# EAGLE board PBC-2 (EAGLE 7.1.0)
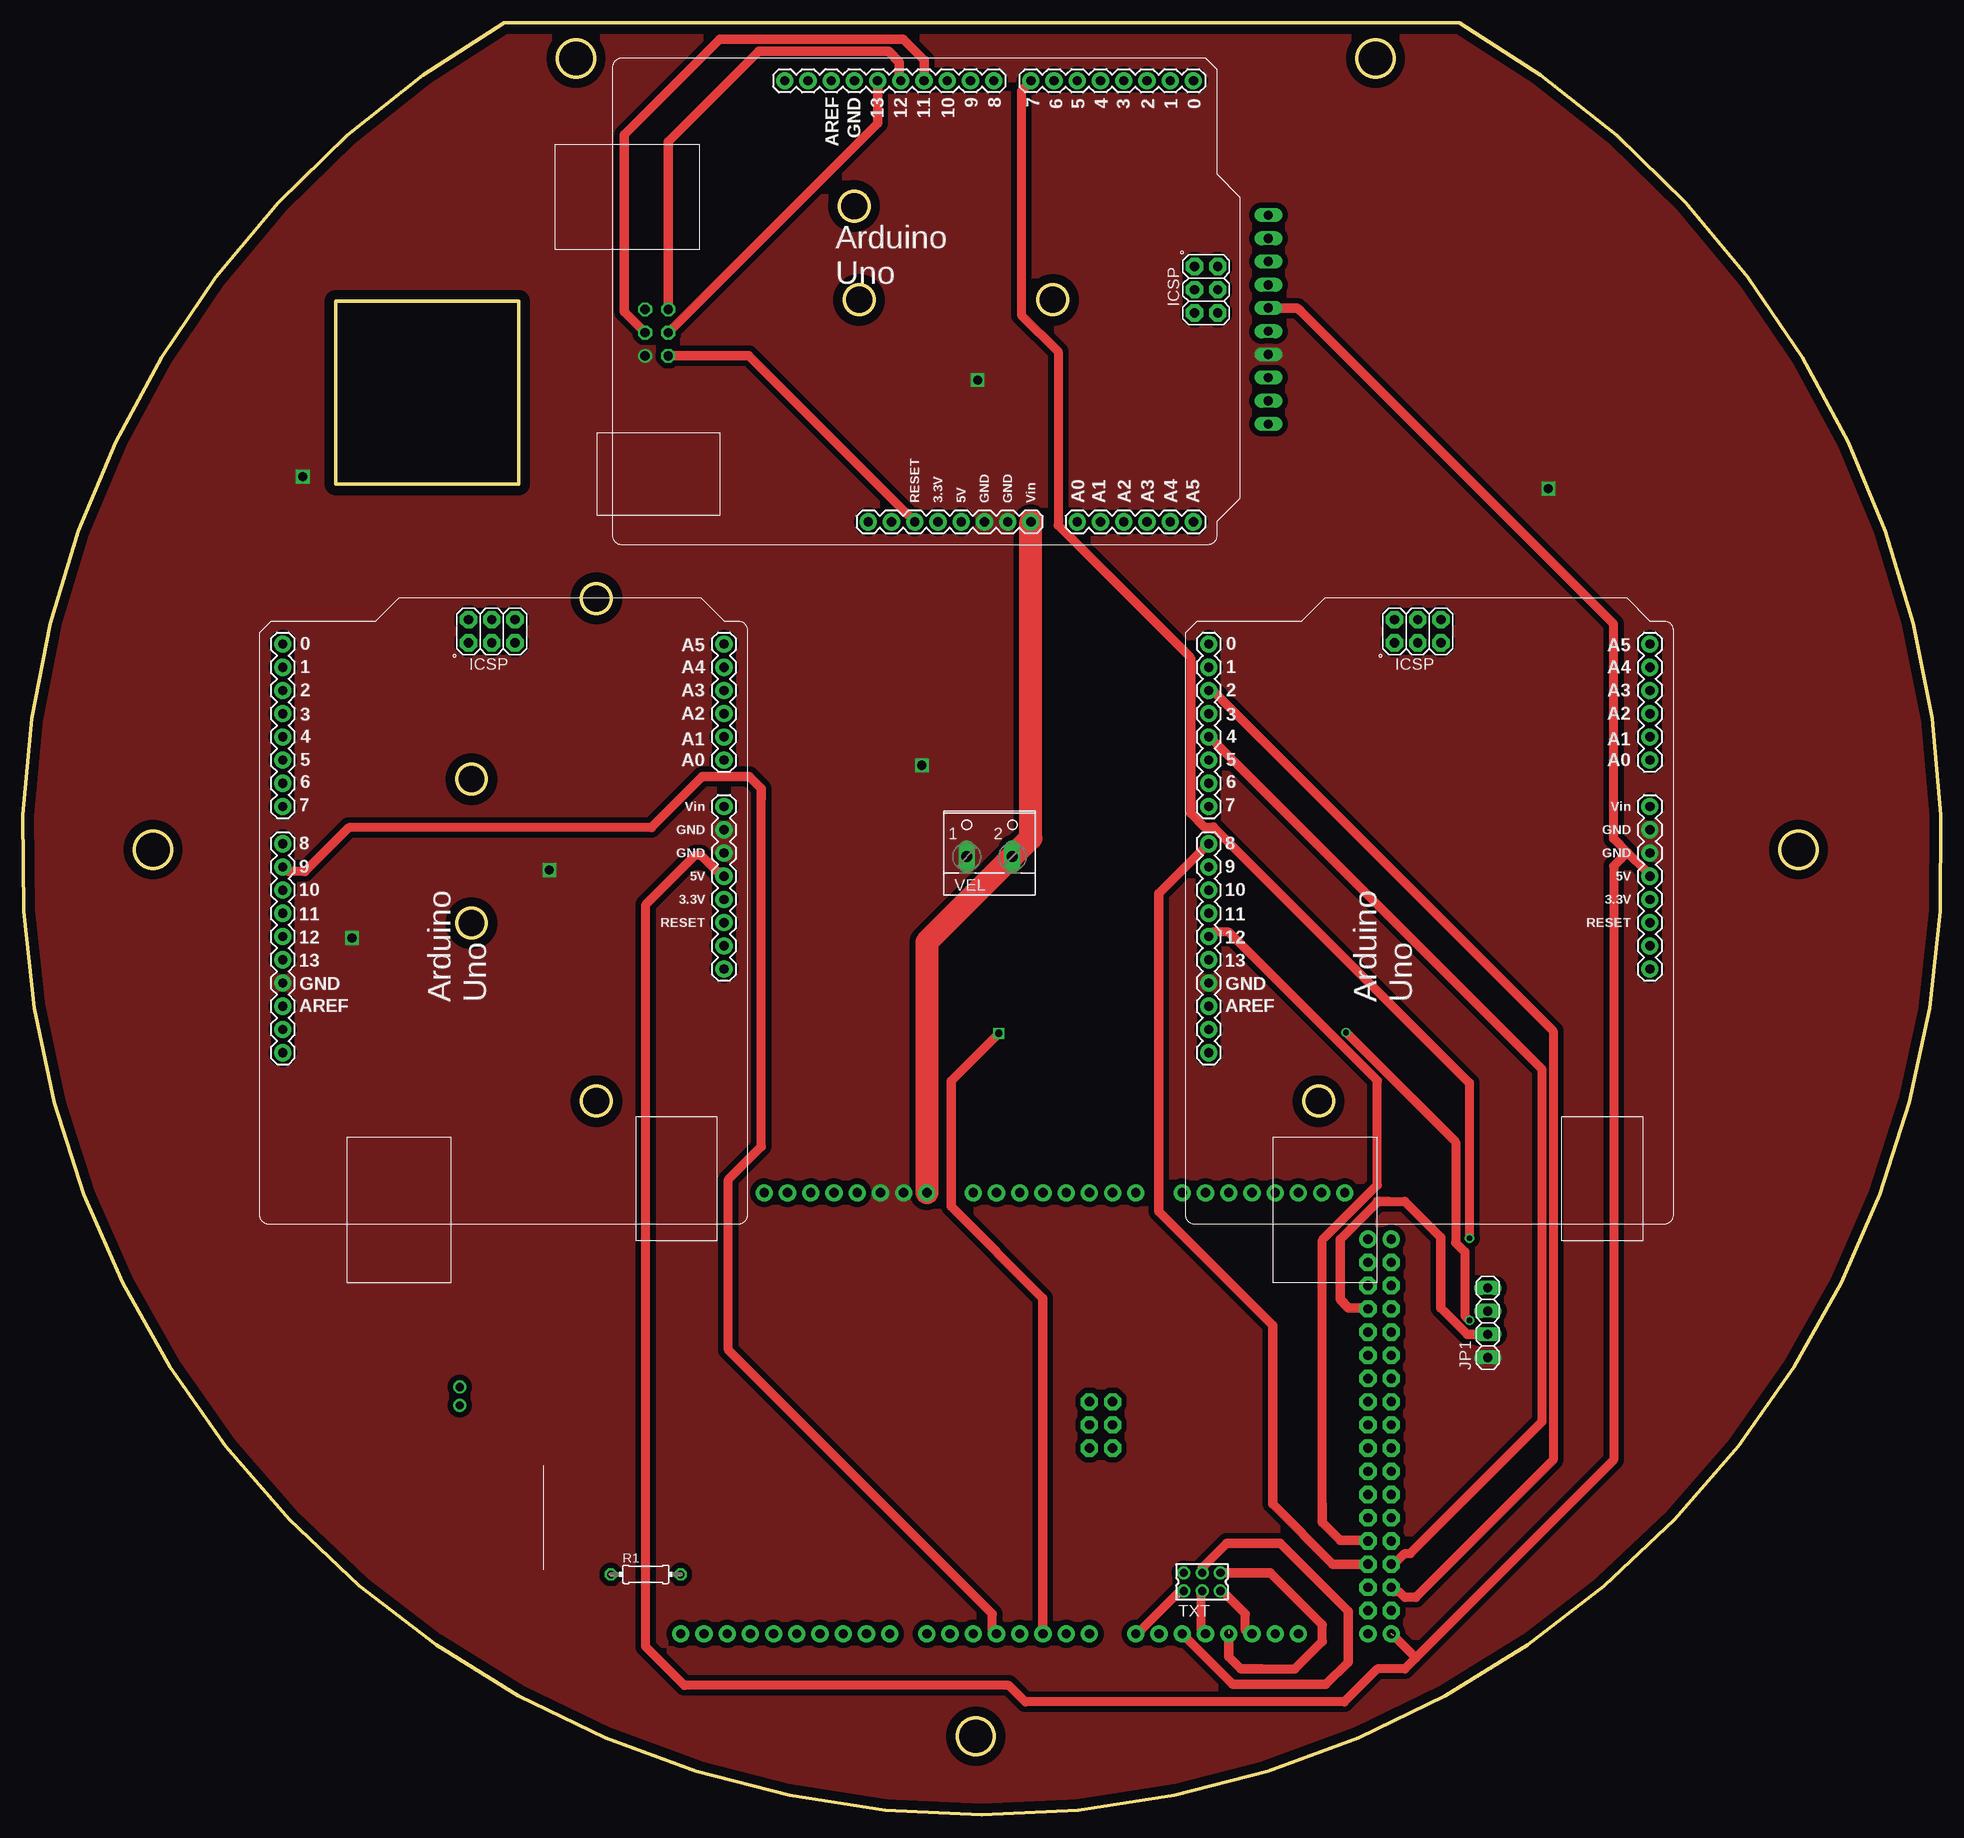
[diagram p0: board, top side]
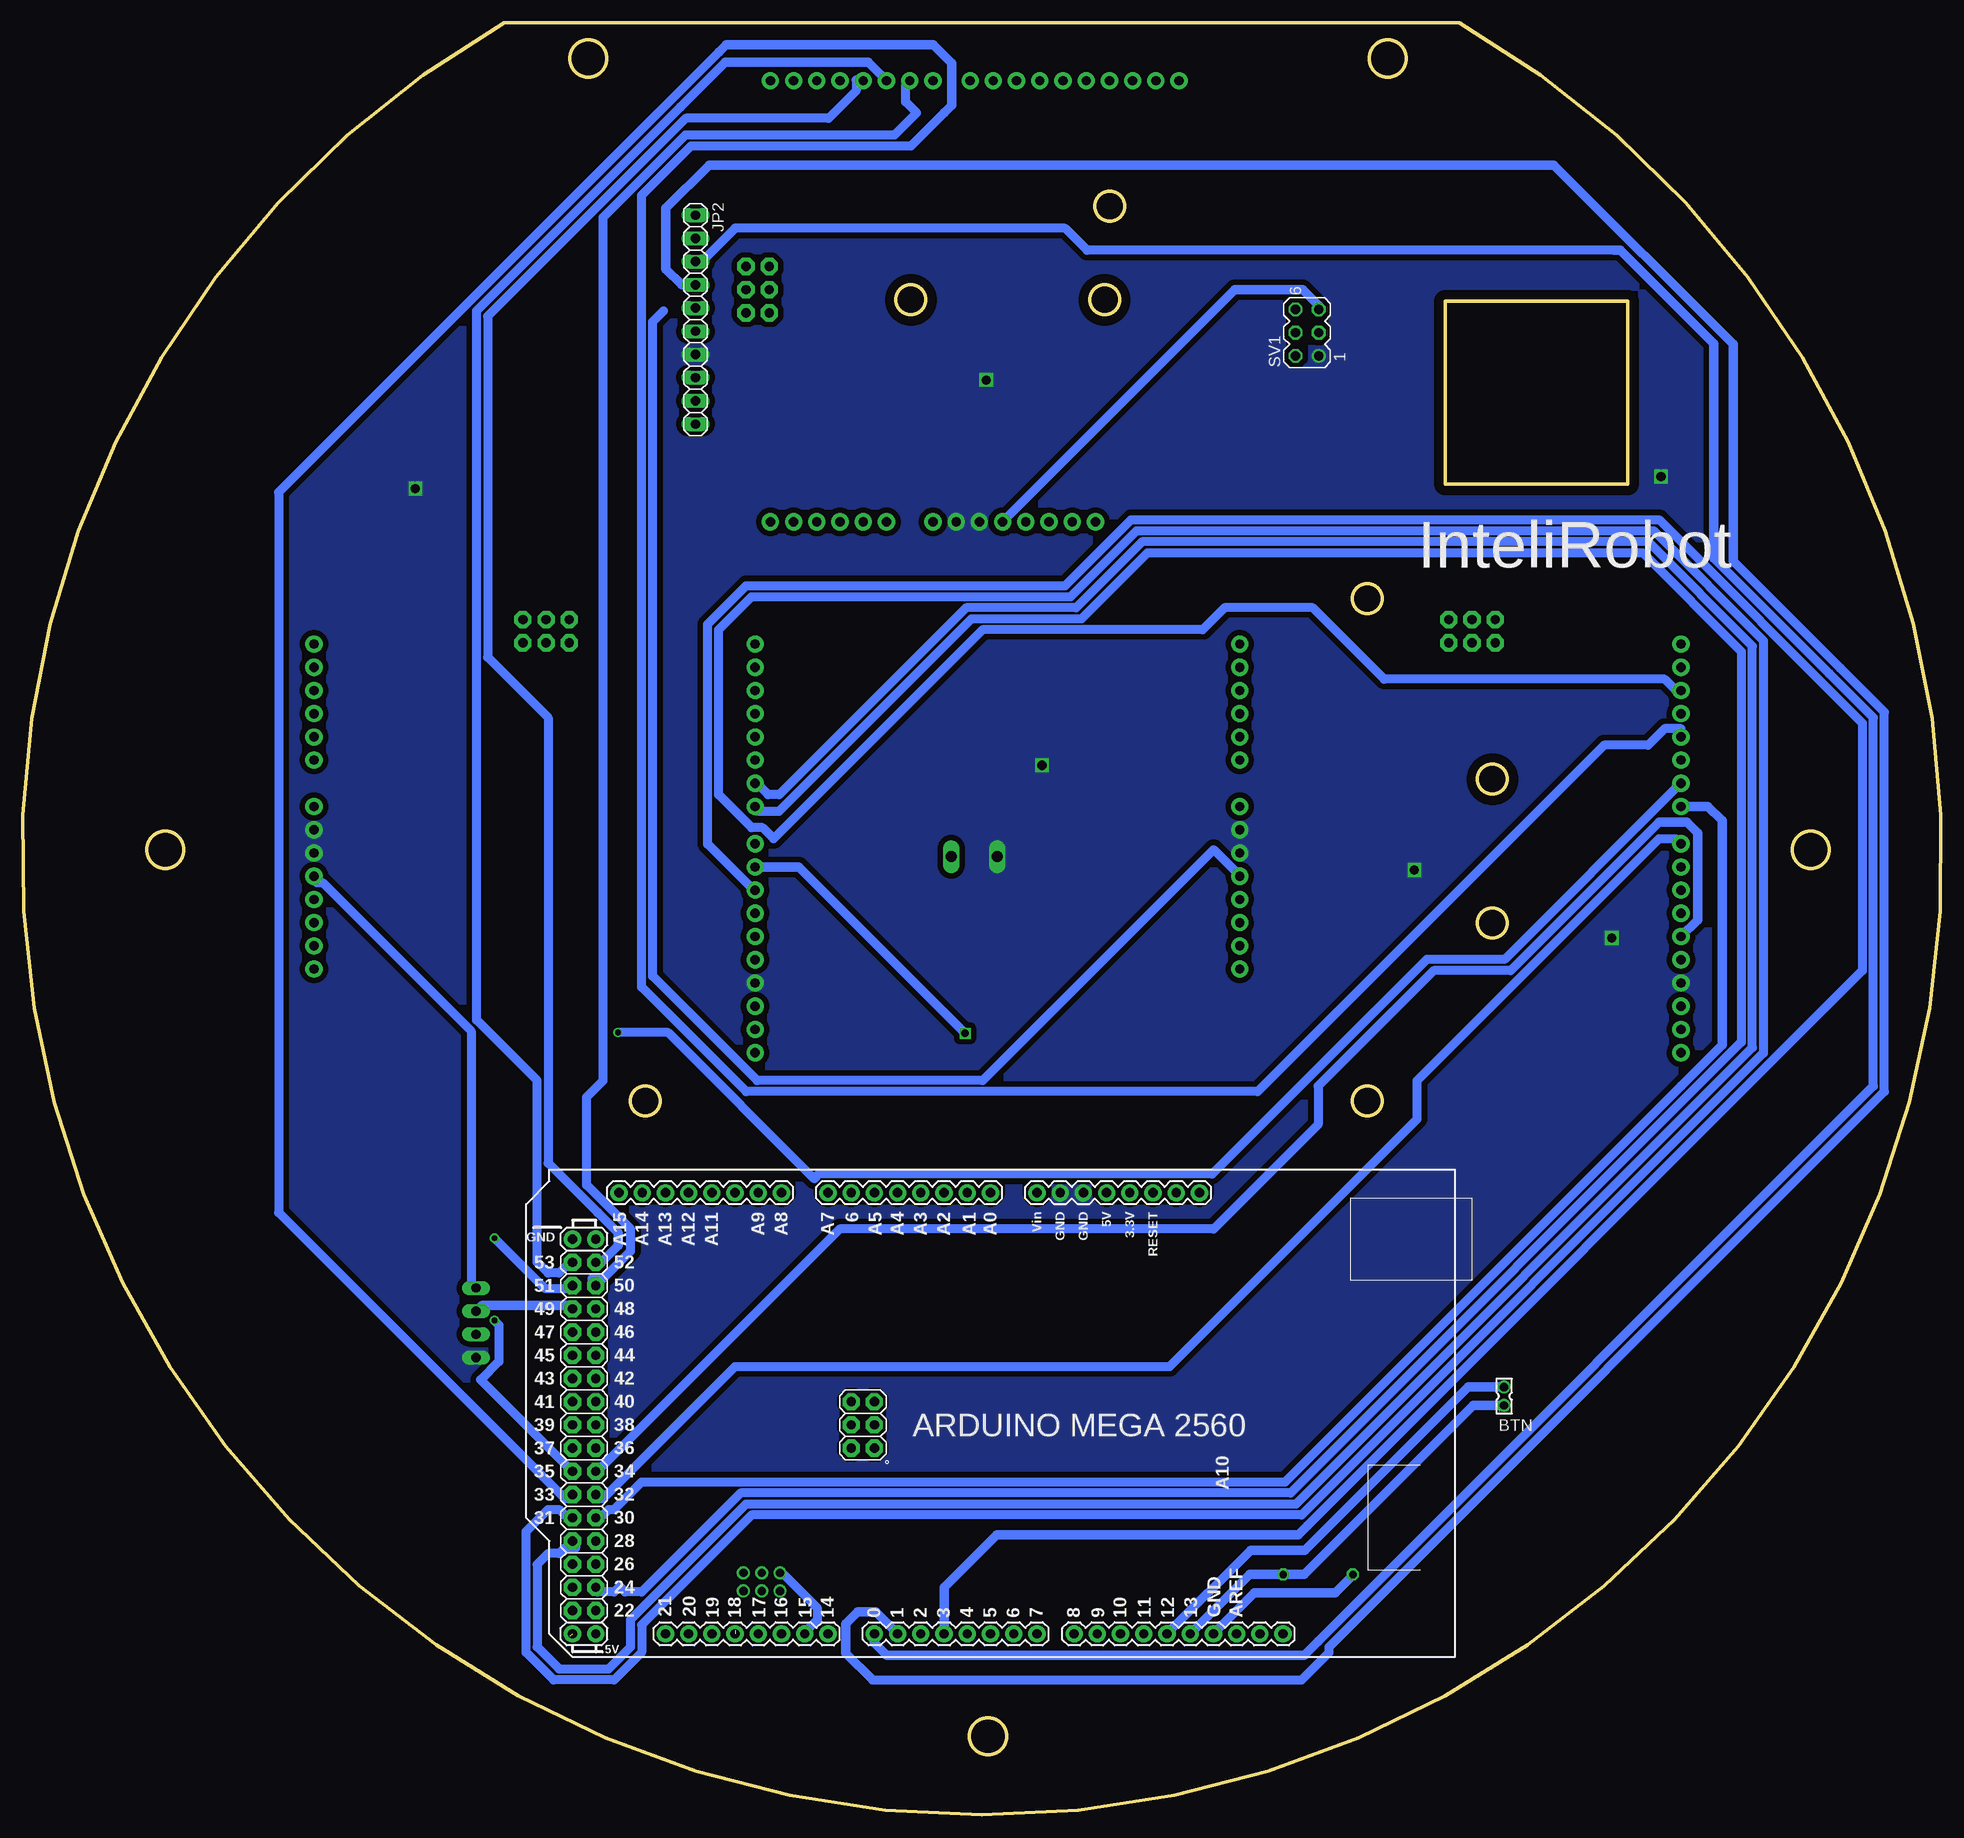
[diagram p1: board, bottom side, seen from below]

Size 209.81 x 196.08 mm. Coordinates in mm from the lower left corner, seen from the top.
Outline: 157.15,196.08 52.67,196.08 arc300 157.15,196.08
Outline: 34.24,145.61 34.24,165.61 54.24,165.61 54.24,145.61 34.24,145.61
Outline: circle at 62.74,133.11 radius 1.6
Outline: circle at 62.74,78.11 radius 1.6
Outline: circle at 90.94,176.04 radius 1.6
Outline: circle at 141.74,78.11 radius 1.6
Outline: circle at 49.08,113.32 radius 1.6
Outline: circle at 49.08,97.58 radius 1.6
Outline: circle at 112.68,165.78 radius 1.6
Outline: circle at 60.51,192.19 radius 2
Outline: circle at 147.97,192.19 radius 2
Outline: circle at 14.24,105.61 radius 2
Outline: circle at 194.24,105.61 radius 2
Outline: circle at 104.24,8.61 radius 2
Outline: circle at 91.48,165.78 radius 1.6
Copper layers (1*16): Top 0.035mm / dielectric 1.5mm / Bottom 0.035mm
Design rules "default *": minimum track width 1mm, minimum drill 24mil, track to track 8mil, track to pad 8mil, pad to pad 8mil, via to via 8mil, smd to smd 8mil, copper to edge 40mil, drill to drill 8mil, minimum pad ring 10mil, minimum via ring 8mil, stop-mask expansion 4mil, vias tented up to drill 0mil, thermal gap 10mil

## Footprints (pad centres in the part's own frame; a part is rotated, then mirrored left to right if it is on the bottom)
332-02 = drill 0.9 pad 1.27: 1 0,-1; 2 0,1
1X04 = drill 1.016 long: 1 -3.81,0; 2 -1.27,0; 3 1.27,0; 4 3.81,0
1X10 = drill 1.016 long: 1 -11.43,0; 2 -8.89,0; 3 -6.35,0; 4 -3.81,0; 5 -1.27,0; 6 1.27,0; 7 3.81,0; 8 6.35,0; 9 8.89,0; 10 11.43,0
ARDUINO_MEGA2560 = drill 1.016 pad 1.88: 0 38.1,50.8; 1 40.64,50.8; 2 43.18,50.8; 3 45.72,50.8; 3.3V 66.04,2.54; 4 48.26,50.8; 5 50.8,50.8; 5V 63.5,2.54; 5V. 7.62,50.8; 5V.. 5.08,50.8; 6 53.34,50.8; 7 55.88,50.8; 8 59.944,50.8; 9 62.484,50.8; 10 65.024,50.8; 11 67.564,50.8; 12 70.104,50.8; 13 72.644,50.8; 14 33.02,50.8; 15 30.48,50.8; 16 27.94,50.8; 17 25.4,50.8; 18 22.86,50.8; 19 20.32,50.8; 20 17.78,50.8; 21 15.24,50.8; A0 50.8,2.54; A1 48.26,2.54; A2 45.72,2.54; A3 43.18,2.54; A4 40.64,2.54; A5 38.1,2.54; A6 35.56,2.54; A7 33.02,2.54; A8 27.94,2.54; A9 25.4,2.54; A10 22.86,2.54; A11 20.32,2.54; A12 17.78,2.54; A13 15.24,2.54; A14 12.7,2.54; A15 10.16,2.54; AREF 77.724,50.8; GND 75.184,50.8; GND. 58.42,2.54; GND.. 60.96,2.54; GND... 7.62,7.62; GND.... 5.08,7.62; I/OREF 71.12,2.54; N/C 73.66,2.54; RESET 68.58,2.54; SCL1 82.804,50.8; SDA1 80.264,50.8; VIN 55.88,2.54 | drill 1.016 pad 1.88 octagon: 22 7.62,48.26; 23 5.08,48.26; 24 7.62,45.72; 25 5.08,45.72; 26 7.62,43.18; 27 5.08,43.18; 28 7.62,40.64; 29 5.08,40.64; 30 7.62,38.1; 31 5.08,38.1; 32 7.62,35.56; 33 5.08,35.56; 34 7.62,33.02; 35 5.08,33.02; 36 7.62,30.48; 37 5.08,30.48; 38 7.62,27.94; 39 5.08,27.94; 40 7.62,25.4; 41 5.08,25.4; 42 7.62,22.86; 43 5.08,22.86; 44 7.62,20.32; 45 5.08,20.32; 46 7.62,17.78; 47 5.08,17.78; 48 7.62,15.24; 49 5.08,15.24; 50 7.62,12.7; 51 5.08,12.7; 52 7.62,10.16; 53 5.08,10.16; +5V_ 35.56,30.48; GND__ 35.56,25.4; MISO 38.1,30.48; MOSI 35.56,27.94; RESET. 38.1,25.4; SCK 38.1,27.94
ARDUINO_UNO = drill 1.016 pad 1.88: 0 63.5,50.8; 1 60.96,50.8; 2 58.42,50.8; 3 55.88,50.8; 3.3V 35.56,2.54; 4 53.34,50.8; 5 50.8,50.8; 5V 38.1,2.54; 6 48.26,50.8; 7 45.72,50.8; 8 41.656,50.8; 9 39.116,50.8; 10 36.576,50.8; 11 34.036,50.8; 12 31.496,50.8; 13 28.956,50.8; A0 50.8,2.54; A1 53.34,2.54; A2 55.88,2.54; A3 58.42,2.54; A4 60.96,2.54; A5 63.5,2.54; AREF 23.876,50.8; GND 26.416,50.8; GND. 43.18,2.54; GND.. 40.64,2.54; I/OREF 30.48,2.54; N/C 27.94,2.54; RESET 33.02,2.54; SCL 18.796,50.8; SDA 21.336,50.8; VIN 45.72,2.54 | drill 1.016 pad 1.88 octagon: +5V 66.167,30.48; GND_ 66.167,25.4; MISO 63.627,30.48; MOSI 66.167,27.94; RESET. 63.627,25.4; SCK 63.627,27.94
0204/7 = drill 0.813 octagon: 1 -3.81,0; 2 3.81,0
MA03-2 = drill 1.016: 1 -2.54,-1.27 | drill 1.016 octagon: 2 -2.54,1.27; 3 0,-1.27; 4 0,1.27; 5 2.54,-1.27; 6 2.54,1.27
87758-0616 = drill 0.9 pad 1.27: 1 -2,-1; 2 -2,1; 3 0,-1; 4 0,1; 5 2,-1; 6 2,1
W237-102 = drill 1.194 long: 1 -2.5,-1.27; 2 2.5,-1.27

## Placement (x,y rotation side)
BTN  [332-02]  47.79,45.82 0 bottom
JP1  [1X04]  160.24,53.85 90 top
JP2  [1X10]  136.24,163.61 270 bottom
MEGA  ARDUINO_MEGA2560  [ARDUINO_MEGA2560]  154.77,70.61 180 top
PUENTE1  ARDUINO_UNO  [ARDUINO_UNO]  180.52,64.61 90 top
PUENTE2  ARDUINO_UNO  [ARDUINO_UNO]  79.24,64.61 90 top
R1  [0204/7]  68.14,26.32 0 top
SV1  [MA03-2]  69.33,162.18 90 bottom
TXT  [87758-0616]  129,25.5 0 top
UNO  ARDUINO_UNO  [ARDUINO_UNO]  64.54,138.95 0 top
VEL  [W237-102]  105.74,106.12 0 top

## Library data of the parts
BTN = con-garry
JP1 JP2 = pinhead
MEGA PUENTE1 PUENTE2 UNO = E14_Arduino_revB
R1 = eagle-ltspice
SV1 = con-lstb; OC_FARNELL: unknown; OC_NEWARK: unknown
TXT = con-molex; MPN: 87758-0616; OC_FARNELL: 7472323; OC_NEWARK: 25M5667
VEL = con-wago-500; MPN: 237-102; OC_FARNELL: unknown; OC_NEWARK: 70K9898

## Nets
+5V: JP1.4 JP2.5 MEGA.5V.. PUENTE1.5V PUENTE2.5V
ECHO: JP1.2 MEGA.48
GND: JP1.1 JP2.7 MEGA.GND. MEGA.GND.. PUENTE1.GND PUENTE1.GND. PUENTE1.GND.. PUENTE2.GND PUENTE2.GND. PUENTE2.GND.. SV1.1 UNO.GND. UNO.GND.. VEL.1
M1ENL: MEGA.35 PUENTE2.6
M1ENR: MEGA.29 PUENTE1.6
M1INAL: MEGA.31 PUENTE2.2
M1INAR: MEGA.25 PUENTE1.2
M1INBL: MEGA.33 PUENTE2.4
M1INBR: MEGA.27 PUENTE1.4
M1PWML: MEGA.4 PUENTE2.9
M1PWMR: MEGA.2 PUENTE1.9
M2ENL: MEGA.34 PUENTE2.12
M2ENR: MEGA.28 PUENTE1.12
M2INAL: MEGA.30 PUENTE2.7
M2INAR: MEGA.24 PUENTE1.7
M2INBL: MEGA.32 PUENTE2.8
M2INBR: MEGA.26 PUENTE1.8
M2PWML: PUENTE2.10
M2PWMR: MEGA.3 PUENTE1.10
MISO: SV1.6 UNO.12
MOSI: SV1.3 UNO.11
PIXY1: MEGA.51 UNO.7
PIXY2: MEGA.50 UNO.6
PIXY3: MEGA.53 UNO.5
PIXY4: MEGA.52 UNO.4
RESET: SV1.2 UNO.RESET
RX-CS: MEGA.15 TXT.2
RX-IR: MEGA.19 TXT.5
RX-LT: MEGA.17 TXT.3
RX-XBEE: MEGA.1
S$1: BTN.2 MEGA.12
S$2: BTN.1 MEGA.13 R1.2
S$3: MEGA.GND R1.1
SCK: SV1.4 UNO.13
SCL: MEGA.SCL1
SDA: MEGA.SDA1
TRIG: JP1.3 MEGA.49
TX-CS: MEGA.14 TXT.1
TX-IR: MEGA.18 TXT.6
TX-LT: MEGA.16 TXT.4
TX-XBEE: JP2.3 MEGA.0
V+: SV1.5 UNO.5V
VCC: MEGA.VIN UNO.VIN VEL.2

## Tracks (layer width: path | path; a pad name or v marks a point on that pad's centre or on a via)
+5V  (1 unrouted)
  Top 1: 139.73,164.57 174.02,130.28 174.02,106.81 175.53,105.31 | 175.53,105.31 177.63,103.21 PUENTE1.5V | 152.36,17.18 149.96,19.58 | 152.36,17.18 174.02,38.83 174.02,103.81 175.53,105.31 | 152.36,17.18 151.16,15.97 148.15,15.97 144.54,12.36 109.65,12.36 107.85,14.17 72.35,14.17 68.14,18.38 68.14,99.6 73.55,105.01 74.16,105.01 75.96,103.21 76.56,103.21 PUENTE2.5V
  Top 1.016: 139.73,164.57 139.42,164.88 JP2.5
  Bottom 1: JP1.4 160.79,58.09 160.79,85.76 177.03,102 177.63,102 178.23,102.6 PUENTE1.5V | 139.73,164.57 140.93,163.37 140.93,91.77 129.5,80.34 104.84,80.34 79.57,105.61 77.16,103.21 PUENTE2.5V
ECHO
  Top 1: 159.58,52.67 160.19,52.67 JP1.2 | 149.36,67.11 151.16,67.11
  Top 1.016: 149.36,67.11 148.15,67.11 148.15,67.02 144.12,62.98 144.12,56.39 145.01,55.5 147.01,55.5 MEGA.48 | 151.16,67.11 155.08,63.19 155.08,55.48 157.97,52.58 JP1.2
GND  (via drill 1)
  other vias: 57.6,103.4 30.62,146.44 36,95.94 166.88,145.11 98.34,114.84 104.44,157
  pour Top (isolate 0.61, no thermals): -3.52,208.97 214.24,205.61 214.24,-4.39 -5.76,-4.39
  pour Bottom (isolate 0.61, no thermals): -5.76,205.61 214.24,205.61 214.24,-4.39 -5.76,-4.39
M1ENL  (via drill 0.61)
  Top 1: v158.24,54.11 157.74,54.61 157.74,61.61 156.74,62.61 156.74,73.61 v144.74,85.61
  Bottom 1: v158.24,54.11 157.74,53.61 157.74,49.61 159.74,47.61 149.74,37.61 MEGA.35 | v144.74,85.61 139.24,85.61 123.24,69.61 122.74,70.11 79.74,70.11 56.24,93.61 47.74,93.61 28.74,112.61 PUENTE2.6
M1ENR
  Bottom 1: PUENTE1.6 129.5,112.83 128.3,111.63 127.1,111.63 106.64,132.08 94.61,132.08 87.39,139.3 32.04,139.3 20.61,127.87 20.61,83.95 70.55,34.02 130.71,34.02 143.34,21.39 143.34,18.38 145.75,15.97 151.16,15.97 153.57,18.38 153.57,27.4 152.36,28.61 151.16,28.61 150.56,29.21 149.36,29.21 149.36,29.81 MEGA.29
M1INAL
  Bottom 1: MEGA.31 149.96,32.82 150.56,32.82 151.16,33.42 152.36,33.42 154.77,31.01 154.77,17.78 151.76,14.77 145.15,14.77 142.14,17.78 142.14,20.79 130.11,32.82 69.95,32.82 19.41,83.35 19.41,128.47 31.44,140.5 87.99,140.5 95.21,133.29 130.11,133.29 133.71,129.68 133.71,111.63 130.11,108.02 128.9,108.02 127.7,106.81 104.84,129.68 80.77,129.68 78.37,132.08 68.74,132.08 60.92,124.26 30.24,124.26 29.04,123.06 PUENTE2.2
M1INAR
  Top 1: MEGA.25 149.96,24.4 150.56,24.4 151.16,23.79 152.36,23.79 167.4,38.83 167.4,85.76 130.11,123.06 PUENTE1.2
M1INBL
  Bottom 1: 133.71,192.84 181.84,144.72 181.84,65.91 150.56,34.62 149.96,34.62 MEGA.33 | 109.05,186.23 112.66,182.62 136.72,182.62 142.14,177.2 142.14,90.57 130.71,79.14 74.76,79.14 36.86,117.04 32.04,117.04 30.24,118.85 28.43,118.85 28.43,118.25 PUENTE2.4
  Bottom 1.016: 109.05,186.23 108.22,187.06 108.22,191.67 110.21,193.66 132.9,193.66 133.71,192.84
M1INBR
  Top 1: PUENTE1.4 130.11,117.64 166.2,81.55 166.2,43.05 151.76,28.61 151.16,28.61 149.96,27.4 MEGA.27
M1PWML
  Top 1: 68.74,108.02 35.65,108.02 30.84,103.21 29.04,103.21 PUENTE2.9 | 80.77,112.23 80.77,111.21 80.77,73.13 77.16,69.52 77.16,50.87 106.04,21.99 106.04,20.18 MEGA.4
  Top 1.016: 68.74,108.02 74.32,113.59 79.47,113.59 80.77,112.28 80.77,111.21
M1PWMR  (via drill 0.8)
  Top 1.016: MEGA.2 111.59,56.54 101.54,66.58 101.54,80.31 v106.75,85.51
  Bottom 1.016: PUENTE1.9 124.96,103.73 v106.75,85.51
M2ENL
  Bottom 1: 30.84,108.62 47.08,92.38 55.51,92.38 68.14,79.74 68.14,75.53 79.57,64.1 120.48,64.1 146.95,37.63 MEGA.34
  Bottom 1.016: 30.84,108.62 27.83,108.62 26.63,107.41 26.63,97.92 PUENTE2.12
M2ENR
  Top 1: 142.14,34.02 142.14,62.9 148.15,68.91 148.15,80.34 131.91,96.59 130.11,96.59 PUENTE1.12
  Top 1.016: 142.14,34.02 142.14,32.01 144.1,30.05 147.06,30.05 MEGA.28
M2INAL
  Bottom 1: 28.43,79.74 71.75,36.43 142.14,36.43 145.15,33.42 145.75,33.42 146.95,32.22 MEGA.30
  Bottom 1.016: 28.43,79.74 23.95,84.23 23.95,108.79 25.49,110.33 PUENTE2.7
M2INAR
  Bottom 1: MEGA.24 146.95,24.4 145.15,24.4 144.54,25 143.94,24.4 142.14,24.4 131.31,35.22 71.15,35.22 21.82,84.56 21.82,127.27 32.65,138.1 86.79,138.1 94.01,130.88 106.04,130.88 127.1,109.82 129.5,109.82 PUENTE1.7
M2INBL
  Bottom 1: PUENTE2.8 29.04,106.81 30.84,106.81 57.31,80.34 57.31,76.13 84.38,49.06 131.91,49.06 146.35,34.62 146.95,34.62 MEGA.32
M2INBR
  Top 1.016: MEGA.26 143.3,27.43 136.71,34.02 136.71,53.57 124.24,66.05 124.24,100.79 PUENTE1.8
M2PWMR
  Bottom 1: 69.34,31.61 8.58,92.38 8.58,119.45 30.84,141.71 88.59,141.71 95.81,134.49 130.71,134.49 134.92,130.28 134.92,106.21 130.11,101.4 PUENTE1.10
  Bottom 1.016: MEGA.3 109.05,23.29 109.05,23.8 109.05,24.91 103.29,30.66 70.29,30.66 69.34,31.61
MISO
  Top 1.016: SV1.6 70.6,183.1 80.49,192.98 94.7,192.98 95.89,191.79 95.89,189.9 UNO.12
MOSI
  Top 1.016: SV1.3 65.78,164.47 65.78,183.84 76.24,194.3 96.3,194.3 98.58,192.01 UNO.11
PIXY1  (via drill 0.61)
  Top 1: v158.24,63.11 158.24,80.11 130.24,108.11 129.24,108.11 127.74,109.61 127.74,126.61 113.24,141.11 113.24,160.11 109.24,164.11 109.24,188.61 110.24,189.61 UNO.7
  Bottom 1: v158.24,63.11 152.74,57.61 149.74,57.61 MEGA.51
PIXY2
  Bottom 1: UNO.6 113.26,189.23 113.26,187.43 112.06,186.23 114.46,183.82 137.32,183.82 146.35,174.8 146.35,80.34 148.15,78.54 148.15,68.91 143.34,64.1 143.34,61.69 146.35,58.69 147.55,58.69 147.55,58.09 MEGA.50
PIXY3
  Bottom 1: 137.93,186.83 160.19,164.57 160.19,86.96 153.57,80.34 153.57,60.49 152.36,59.29 151.16,59.29 149.96,60.49 MEGA.53
  Bottom 1.016: 137.93,186.83 132.97,191.79 117.36,191.79 115.34,189.78 UNO.5
PIXY4
  Bottom 1: 146.95,65.91 152.36,71.32 152.36,120.05 158.98,126.67 158.98,163.97 137.32,185.62 121.68,185.62 118.67,188.63 118.67,189.84 118.07,189.84 UNO.4
  Bottom 1.016: 146.95,65.91 144.71,63.66 144.71,62.29 146.54,60.45 MEGA.52
RESET
  Top 1.016: SV1.2 79.41,159.64 UNO.RESET
RX-CS
  Bottom 1: TXT.2 126.5,26.2 122.89,22.59 122.89,21.39 124.09,20.18 MEGA.15
RX-IR
  Top 1: TXT.5 131.31,24.4 133.71,21.99 133.71,20.18 134.32,19.58 MEGA.19
RX-LT
  Top 1: TXT.3 128.9,24.4 128.9,20.18 MEGA.17
RX-XBEE
  Bottom 1: 10.99,125.46 6.18,120.65 6.18,79.14 66.94,18.38 66.94,17.78 69.95,14.77 116.87,14.77 | 114.46,20.18 MEGA.1
  Bottom 1.016: 116.87,14.77 119.8,17.69 119.8,20.92 118.51,22.2 116.51,22.2 MEGA.1 | 136.14,167.42 137.75,167.42 139.47,169.14 139.47,175.78 134.75,180.51 42.34,180.51 22.73,160.9 22.73,137.21 10.99,125.46
S$1
  Bottom 1.016: MEGA.12 75.51,28.97 69.57,28.97 51.72,46.82 BTN.2
S$2
  Bottom 1.016: R1.2 72.47,26.32 | 72.47,26.32 75.62,26.32 MEGA.13 | 72.47,26.32 72.46,26.33 69.64,26.33 51.15,44.82 BTN.1
S$3
  Bottom 1.016: MEGA.GND 75.11,24.29 66.28,24.29 64.33,26.24 R1.1
SCK
  Top 1.016: SV1.4 93.5,185.08 UNO.13
TRIG
  Bottom 1.016: MEGA.49 150.09,55.78 159.58,55.78 JP1.3
TX-CS
  Top 1: TXT.1 126.5,24.4 122.28,20.18 MEGA.14
TX-IR  (1 unrouted)
  Top 1: 142.14,20.79 142.14,18.98 139.13,15.97 135.52,15.97
  Top 1.016: 142.14,20.79 136.42,26.5 TXT.6 | 131.91,20.18 131.91,17.3 133.24,15.97 135.52,15.97
TX-LT
  Top 1.016: MEGA.16 132.36,14.28 142.55,14.28 144.97,16.7 144.97,22.26 137.52,29.71 131.69,29.71 129,27.01 TXT.4
TX-XBEE
  Bottom 1: 131.91,173.59 95.81,173.59 93.41,171.19 35.77,171.19 35.05,171.19 | 12.19,124.86 7.38,120.05 7.38,79.74 68.14,18.98 | 116.27,19.58 MEGA.0
  Bottom 1.016: 116.67,19.38 MEGA.0 116.67,18.86 115.3,17.49 69.63,17.49 68.14,18.98 | 131.91,173.59 135.54,169.96 JP2.3 | 12.19,124.86 24.84,137.51 24.84,160.97 35.05,171.19 35.77,171.19
V+
  Bottom 1.016: UNO.5V 77.25,166.88 69.8,166.88 68.06,165.15 SV1.5
VCC
  Top 2.54: UNO.VIN 110.26,106.87 VEL.2 98.89,95.49 MEGA.VIN

## Text on the board
bNames: InteliRobot
200bmp: C:/Users/carlos hugo/Desktop/github/L16/electronica/PBC-2/InteliRobot.bmp